# Allegro board P1_PCB_rev2.brd
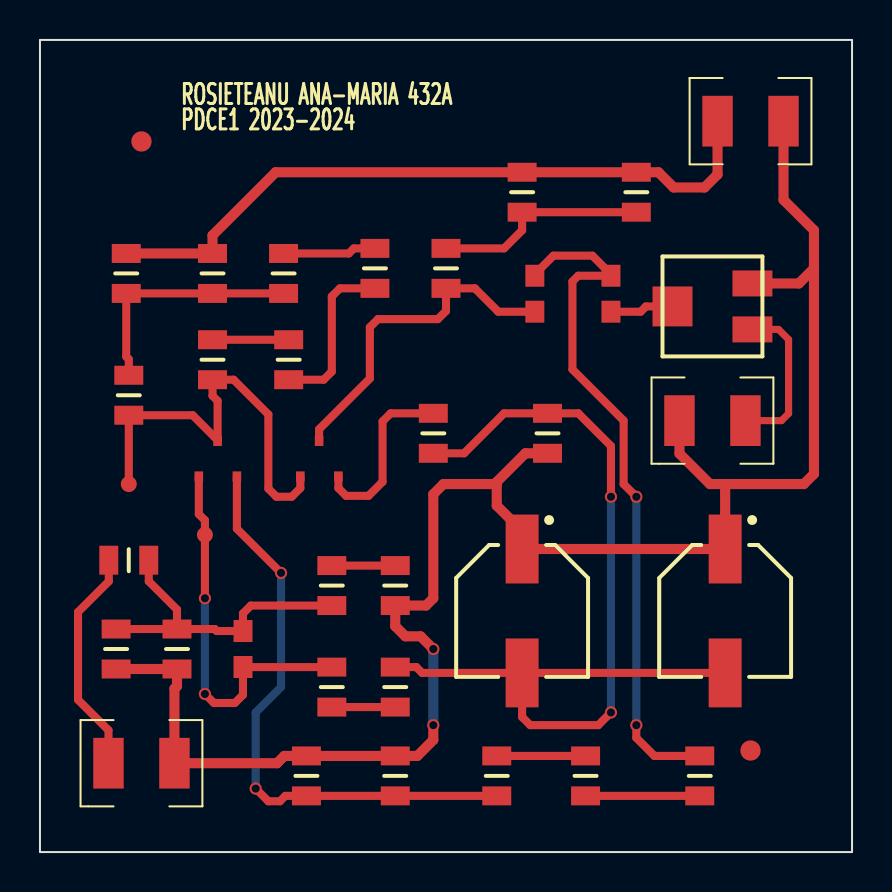
[diagram p0: board, top side]
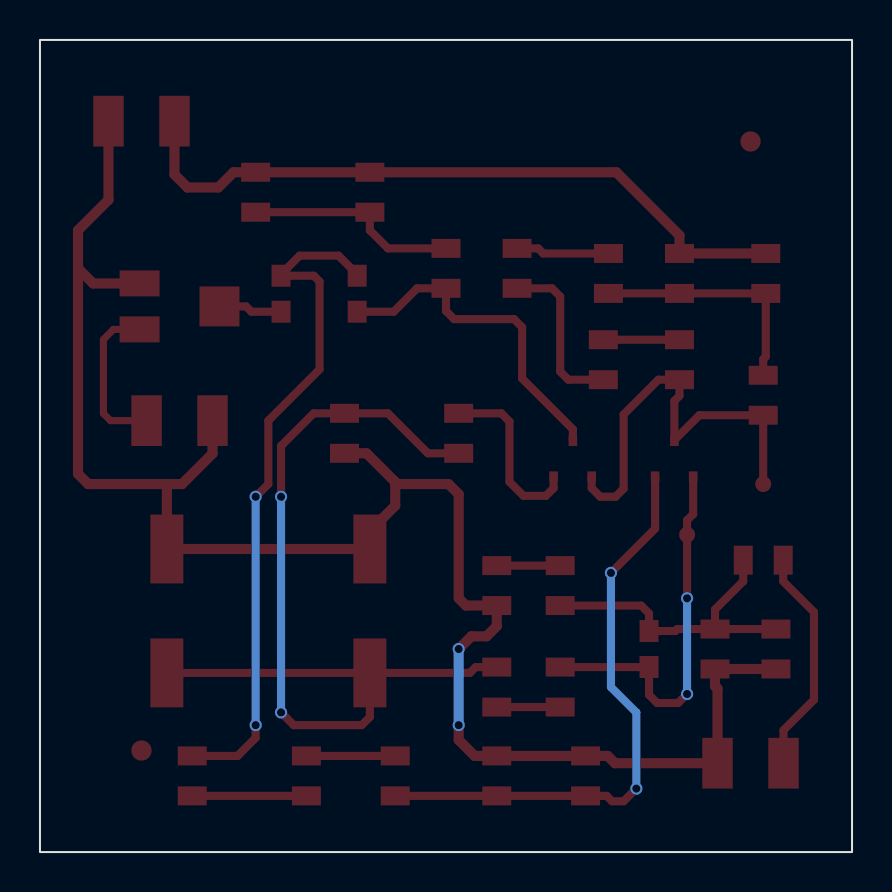
[diagram p1: board, bottom side, seen from below]

Outline 40.64 x 40.64 mm; copper layers: TOP, BOTTOM. Coordinates in mm from the lower left corner of the outline.
Outline path: rectangle 0,0 40.64,40.64

## Design rules (mm)
constraint set DEFAULT: min track width 0.356, pair gap 0.356
nets with their own width: min track width 0.406; nets N14891 N15039 N15045 N15123 N15129 N15133 N15223 N15237 N15255 N15309 N15347 N15389 N15489 N15493 N15505 N15537 N15769 N16037 N16043
nets with their own width: min track width 0.508; nets 0 VCC

## Placement (name value [footprint] x y rotation side)
C1  4.7u  [CAPC2008X126N_0805]  10.16 10.16 270 top
C2  4.7u  [CAPC2008X126N_0805]  24.77 27.94 90 top
C3  4.7u  [CAPC2008X126N_0805]  28.57 27.94 270 top
C4  10u  [CAPAE660X770N]  24.13 12.06 270 top
C5  10u  [CAPAE660X770N]  34.29 12.06 270 top
J1  CON2  [1210RF_WV_12D]  5.08 4.45 180 top
J2  CON2  [1210RF_WV_12D]  35.56 36.58 0 top
J5  CON2  [1210RF_WV_12D]  33.66 21.59 180 top
NOREF  Value  [unnamed]  35.56 5.08 0 top
NOREF#2  Value  [unnamed]  5.08 35.56 0 top
Q1  BC846B  [SOT23]  8.89 19.68 90 top
Q2  BC846B  [SOT23]  13.97 19.68 90 top
R1  100k  [RES2012X50N_0805]  6.86 10.16 90 top
R2  180k  [RES2012X50N_0805]  12.45 24.64 90 top
R3  2k  [RES2012X50N_0805]  13.34 3.81 270 top
R4  10k  [RES2012X50N_0805]  20.32 29.21 90 top
R5  1k  [RES2012X50N_0805]  25.4 20.95 90 top
R6  180k  [RES2012X50N_0805]  14.61 8.26 90 top
R7  22k  [RES2012X50N_0805]  22.86 3.81 270 top
R9  1  [RES2012X50N_0805]  19.68 20.95 90 top
R11  100k  [RES2012X50N_0805]  4.45 14.61 0 top
R12  1k  [RES2012X50N_0805]  14.61 13.34 270 top
R13  220k  [RES2012X50N_0805]  4.32 28.96 270 top
R14  50k  [TRIM_BI_23AN]  33.66 27.3 0 top
R15  68k  [RES2012X50N_0805]  33.02 3.81 90 top
R17  10k  [RES2012X50N_0805]  27.3 3.81 270 top
R18  150k  [RES2012X50N_0805]  8.64 28.96 270 top
R19  220k  [RES2012X50N_0805]  4.45 22.86 90 top
R20  180k  [RES2012X50N_0805]  17.78 8.26 90 top
R22  10k  [RES2012X50N_0805]  24.13 33.02 90 top
R23  10k  [RES2012X50N_0805]  29.84 33.02 90 top
R24  3.3k  [RES2012X50N_0805]  17.78 13.34 90 top
R25  2k  [RES2012X50N_0805]  17.78 3.81 270 top
R26  15k  [RES2012X50N_0805]  12.19 28.96 270 top
R27  15k  [RES2012X50N_0805]  8.64 24.64 270 top
R28  10k  [RES2012X50N_0805]  16.76 29.21 90 top
R29  100k  [RES2012X50N_0805]  3.81 10.16 90 top
TP1  CON1  [TP80]  8.26 15.88 0 top
TP2  CON1  [TP80]  4.45 18.41 0 top

## Library data of the parts
C1-C5 = C
J1 J2 J5 = CON2
Q1 Q2 = BC846B
R1-R7 R9 R11-R13 R15 R17-R20 R22-R29 = R
R14 = POT
TP1 TP2 = CON1

## Footprints (pads in the part's own frame, mm; a bottom-side part is the same pattern mirrored in y, then rotated)
1210RF_WV_12D
  rect 1.524x2.54 smd: 1(-1.651,0) 2(1.651,0)
CAPAE660X770N
  rect 3.45x1.65 smd: 1(-3.1,0) 2(3.1,0)
CAPC2008X126N_0805
  rect 1.1x0.95 smd: 1(-0.9,0) 2(0.9,0)
RES2012X50N_0805
  rect 0.95x1.45 smd: 1(-1,0) 2(1,0)
SOT23
  rect 0.508x0.432 smd: 1(-0.889,0.94) 2(-0.889,-0.965) 3(0.889,0)
TP80
  round 0.8 smd: 1(0,0)
TRIM_BI_23AN
  rect 2x1.3 smd: 1(2,1.15) 2(2,-1.15)
  rect 2x2 smd: 3(-2,0)
unnamed
  round 1.016 smd: 1(0,0)

## Nets
VCC: J2.1 R13.1 R18.1 R22.2 R23.2
0: C4.1 C5.1 J1.1 J2.2 J5.2 R1.1 R3.1 R5.1 R14.1 R24.1 R25.1 R29.1
N14891: R13.2 R18.2 R19.2 R26.2
N15039: R26.1 R28.2
N15045: R4.2 R22.1 R23.1
N15123: R2.1 R28.1
N15129: C2.1 Q2.3 R4.1
N15133: Q1.3 Q2.1 R19.1 R27.2 TP2.1
N15223: C2.2 C3.1 R15.2
N15237: C3.2 R14.3
N15255: R2.2 R27.1
N15309: Q2.2(E) R9.2
N15347: C1.2 Q1.1 R6.2 TP1.1
N15389: Q1.2(E) R3.2 R7.2 R25.2
N15489: C4.2 C5.2 R5.2 R9.1 R20.2
N15493: J1.2 R11.1
N15505: C1.1 R1.2 R11.2 R12.2 R29.2
N15537: R6.1 R20.1
N15613: J5.1 R14.2(T)
N15769: R12.1 R24.2
N16037: R7.1 R17.1
N16043: R15.1 R17.2

Pads without a net: NOREF 1; NOREF#2 1

## Via types
v1: diameter 0.61, hole 0.406, TOP to BOTTOM, 10 vias

## Routing (per net, layer and track width the routed paths; a pad name or vN(x,y) marks a point on that pad's centre or on a via; arc(x,y) is an arc through that point)
VCC: length 35.1
  TOP w0.508: R13.1 R18.1 8.64,30.86 11.79,34.02 R22.2 R23.2 30.95,34.02 31.71,33.26 33.26,33.26 33.91,33.91 J2.1
0: length 91.2
  TOP w0.508: 34.29,18.41 C5.1 C4.1 24.13,16.07 22.86,17.34 22.86,18.41 ; 34.29,18.41 38.23,18.41 38.73,18.92 38.73,29.21 ; 34.29,18.41 33.53,18.41 32,19.94 J5.2 ; 22.86,18.41 20.19,18.41 19.68,17.91 19.68,12.7 19.32,12.34 R24.1 17.78,11.3 18.29,10.79 19.05,10.79 v1(19.68,10.16) ; 22.86,18.41 22.86,18.52 24.29,19.96 R5.1 ; R14.1 37.98,28.46 38.73,29.21 ; J2.2 37.21,32.64 38.73,31.11 38.73,29.21 ; v1(19.68,6.35) 19.68,5.61 18.89,4.81 R25.1 R3.1 12.23,4.81 11.86,4.45 J1.1 6.73,8.18 6.86,8.3 R1.1 R29.1
  BOTTOM w0.508: v1(19.68,6.35) v1(19.68,10.16)
N14891: length 12
  TOP w0.406: R19.2 4.45,24.67 4.32,24.79 R13.2 R18.2 R26.2
N15039: length 4.7
  TOP w0.406: R26.1 15.45,29.96 15.71,30.21 R28.2
N15045: length 10.8
  TOP w0.406: R23.1 R22.1 24.13,31.11 23.22,30.21 R4.2
N15123: length 8.4
  TOP w0.406: R2.1 14.2,23.64 14.61,24.04 14.61,27.8 15.01,28.21 R28.1
N15129: length 17
  TOP w0.406: C2.1 22.94,27.04 21.77,28.21 R4.1 20.32,27.08 19.91,26.67 16.92,26.67 16.51,26.26 16.51,23.7 13.97,21.16 Q2.3
N15133: length 21.3
  TOP w0.406: TP2.1 R19.1 7.64,21.86 8.89,20.61 ; 8.89,20.61 8.89,22.58 8.64,22.83 R27.2 9.69,23.64 11.43,21.9 11.43,18.19 11.84,17.78 12.6,17.78 13.03,18.21 Q2.1 ; 8.89,20.61 Q1.3
N15223: length 34.5
  TOP w0.406: R15.2 30.75,4.81 29.84,5.71 v1(29.84,6.35) ; C2.2 24.77,28.92 25.69,29.84 27.65,29.84 28.57,28.92 C3.1 26.93,28.84 26.65,28.55 26.65,24.15 29.21,21.59 29.21,18.41 v1(29.84,17.78)
  BOTTOM w0.406: v1(29.84,17.78) v1(29.84,6.35)
N15237: length 3.2
  TOP w0.406: R14.3 30.32,27.3 30.06,27.04 C3.2
N15255: length 3.8
  TOP w0.406: R27.1 R2.2
N15309: length 9
  TOP w0.406: Q2.2 14.94,18.21 15.32,17.83 16.44,17.83 17.14,18.53 17.14,21.55 17.55,21.95 R9.2
N15347: length 19.1
  TOP w0.406: R6.2 10.46,9.25 10.46,9.26 C1.2 10.16,7.87 9.75,7.46 8.7,7.46 v1(8.26,7.91) ; Q1.1 7.95,16.91 8.26,16.61 TP1.1 v1(8.26,12.7)
  BOTTOM w0.406: v1(8.26,12.7) v1(8.26,7.91)
N15389: length 29.5
  TOP w0.406: v1(10.79,3.17) 11.43,2.54 12.01,2.54 12.28,2.81 R3.2 R25.2 R7.2 ; v1(12.06,13.97) 9.86,16.18 Q1.2
  BOTTOM w0.406: v1(10.79,3.17) 10.79,6.99 12.06,8.26 v1(12.06,13.97)
N15489: length 47.4
  TOP w0.406: v1(28.57,6.99) 27.94,6.35 24.54,6.35 24.13,6.76 C4.2 ; v1(28.57,17.78) 28.57,20.32 26.94,21.95 R5.2 23.23,21.95 21.23,19.96 R9.1 ; C4.2 19.13,8.96 18.84,9.25 R20.2 ; C4.2 C5.2
  BOTTOM w0.406: v1(28.57,6.99) v1(28.57,17.78)
N15493: length 11.4
  TOP w0.406: 3.43,4.45 3.43,6.1 1.91,7.62 1.91,12.01 3.45,13.55 R11.1
N15505: length 15.9
  TOP w0.406: R1.2 6.86,12.14 5.44,13.55 R11.2 ; R1.2 R29.2 ; R1.2 8.75,11.16 8.85,11.06 C1.1 10.16,11.94 10.55,12.34 R12.2
N15537: length 3.2
  TOP w0.406: R20.1 R6.1
N15613: length 8
  TOP w0.356: R14.2 36.96,26.15 37.47,25.65 37.47,21.95 37.11,21.59 J5.1
N15769: length 3.2
  TOP w0.406: R24.2 R12.1
N16037: length 4.4
  TOP w0.406: R17.1 R7.1
N16043: length 5.7
  TOP w0.406: R17.2 R15.1

## Text on the board
Ref Des/Silkscreen Top: ROSIETEANU ANA-MARIA 432A | PDCE1 2023-2024
XSECTION_CHART: *  SURFACE | L1 TOP CONDUCTOR | *  DIELECTRIC | L2 BOTTOM CONDUCTOR | DESIGN CROSS SECTION CHART | ___________________________ | TOTAL THICKNESS 63 MIL | 1-2
DISPLAY_TOP: FIGURE | FINISHED_SIZE | 16.0 | DRILL CHART: TOP to BOTTOM | ALL UNITS ARE IN MILS | PLATED | QTY | 10
